# Altium PCB PCB2.PcbDoc
Units mil, origin at the board's own origin, x right, y up, seen from the top; angles counter-clockwise.
Board outline 1340 x 970 mil, 2 copper layers (Top Layer, Bottom Layer); 12 components, 9 nets, 58 pads, 7 vias.
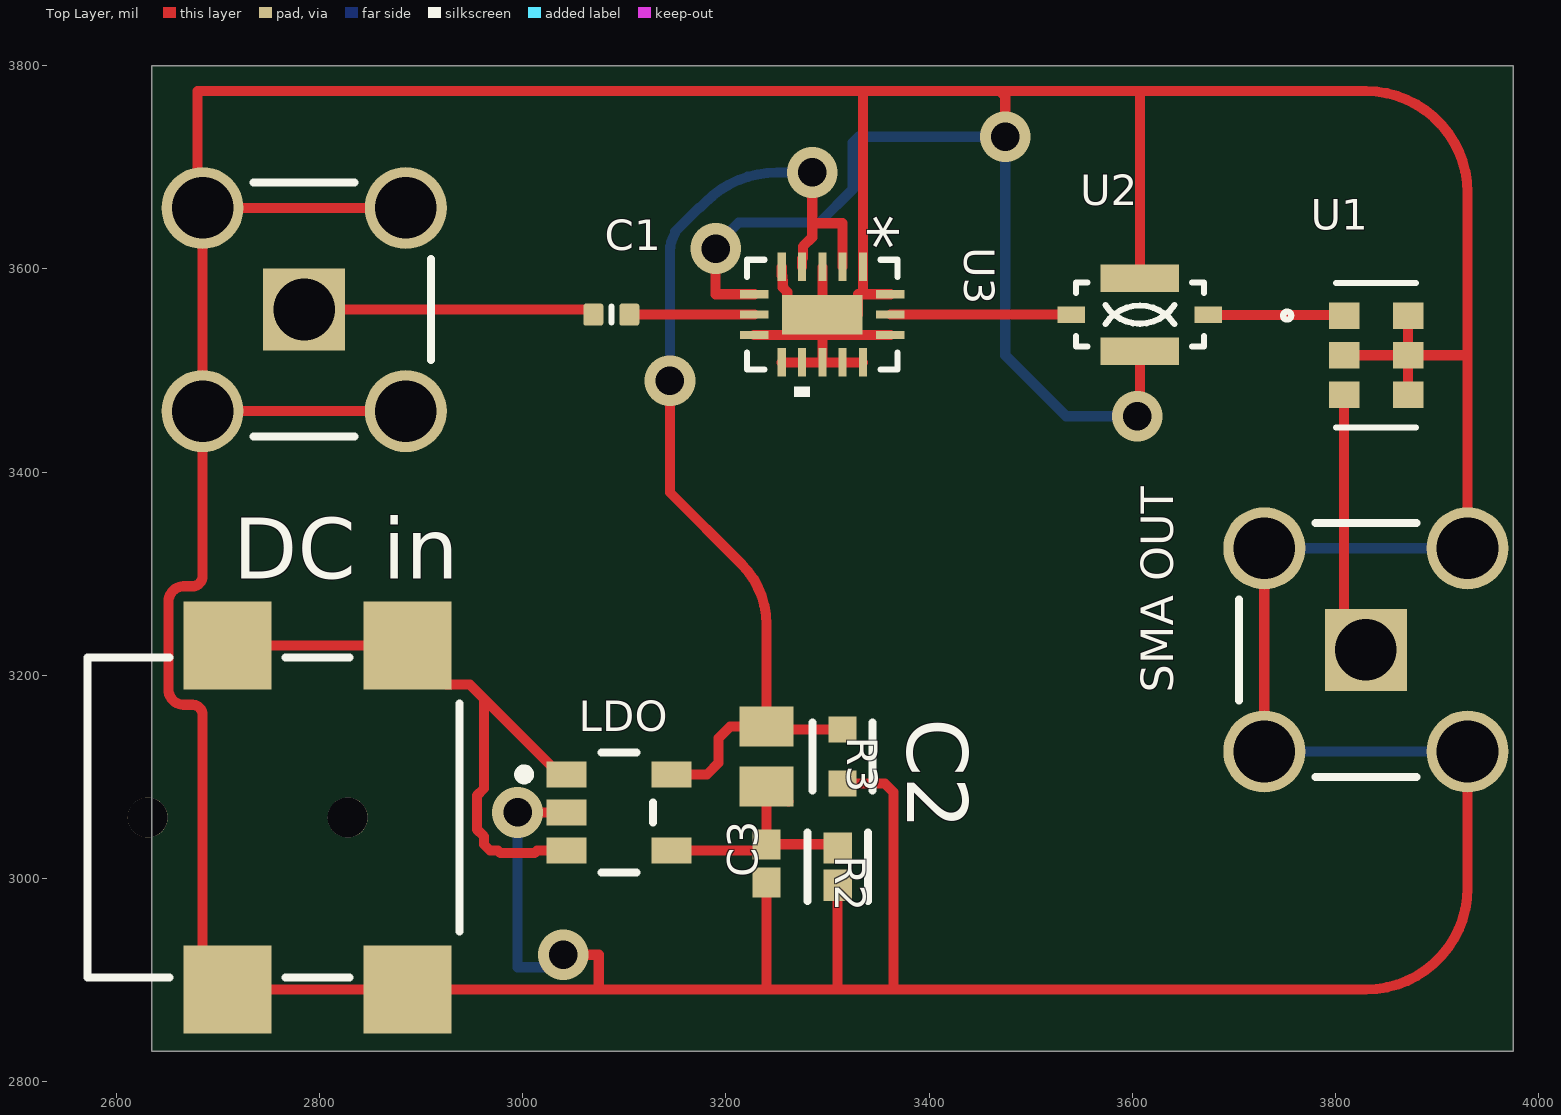
[diagram p0: Top Layer view]
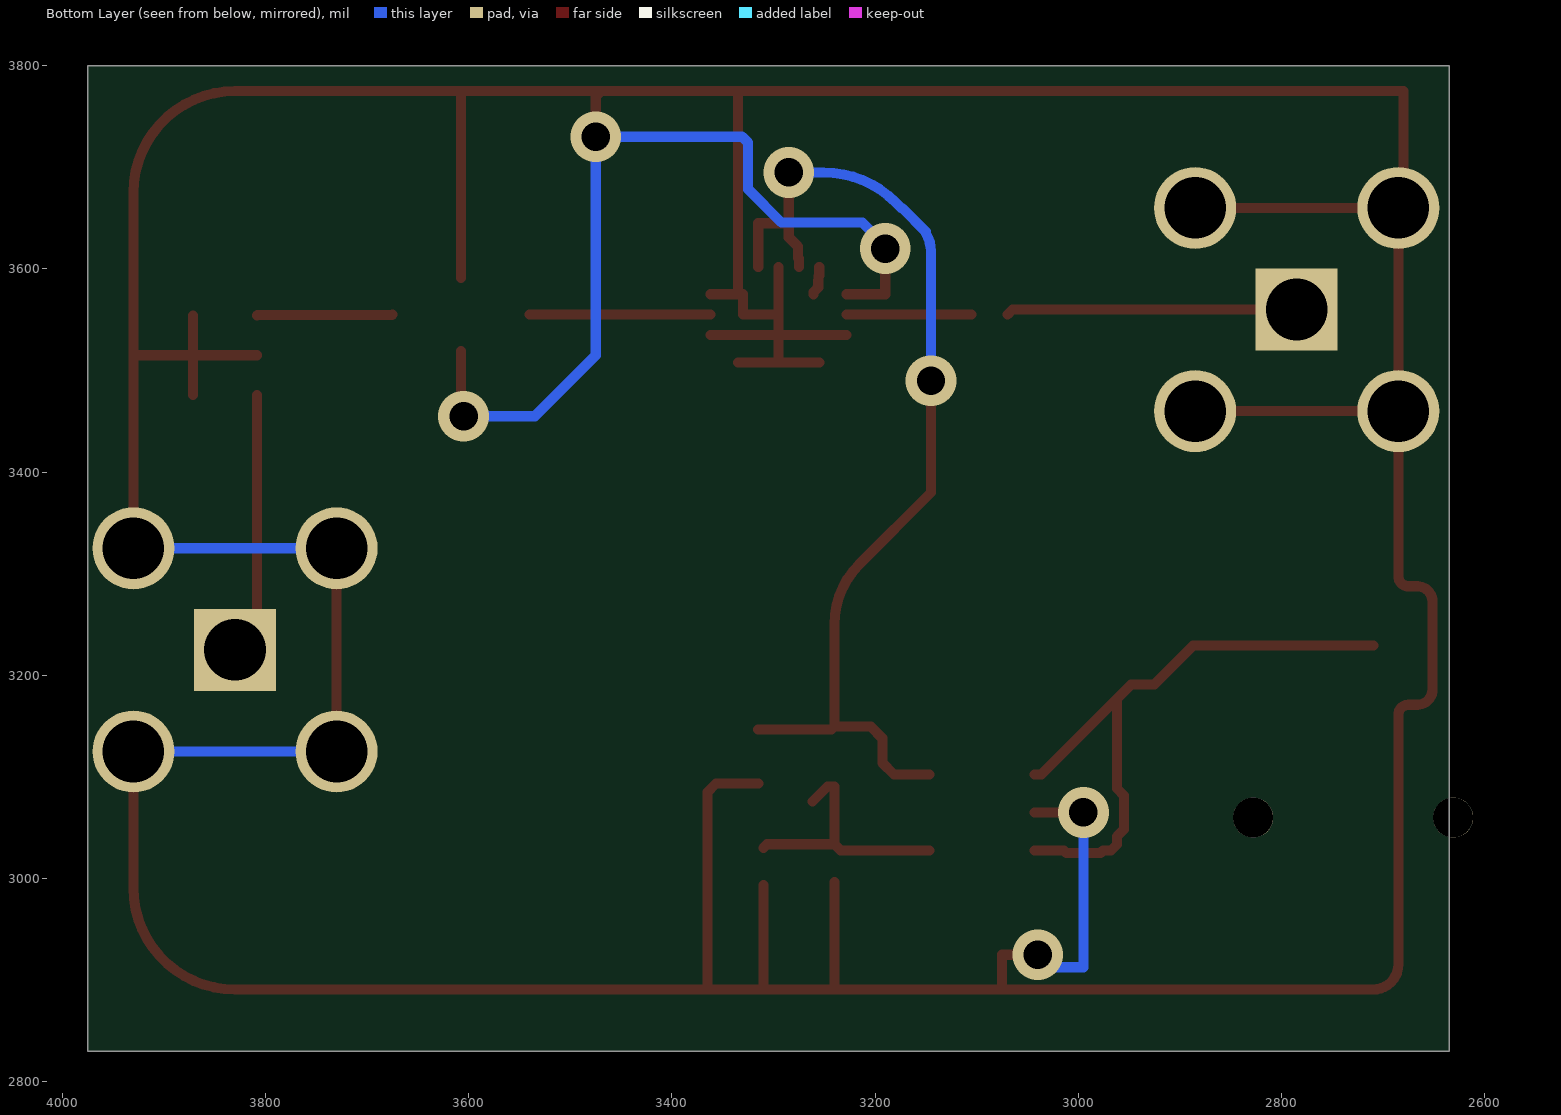
[diagram p1: Bottom Layer view, seen from below]
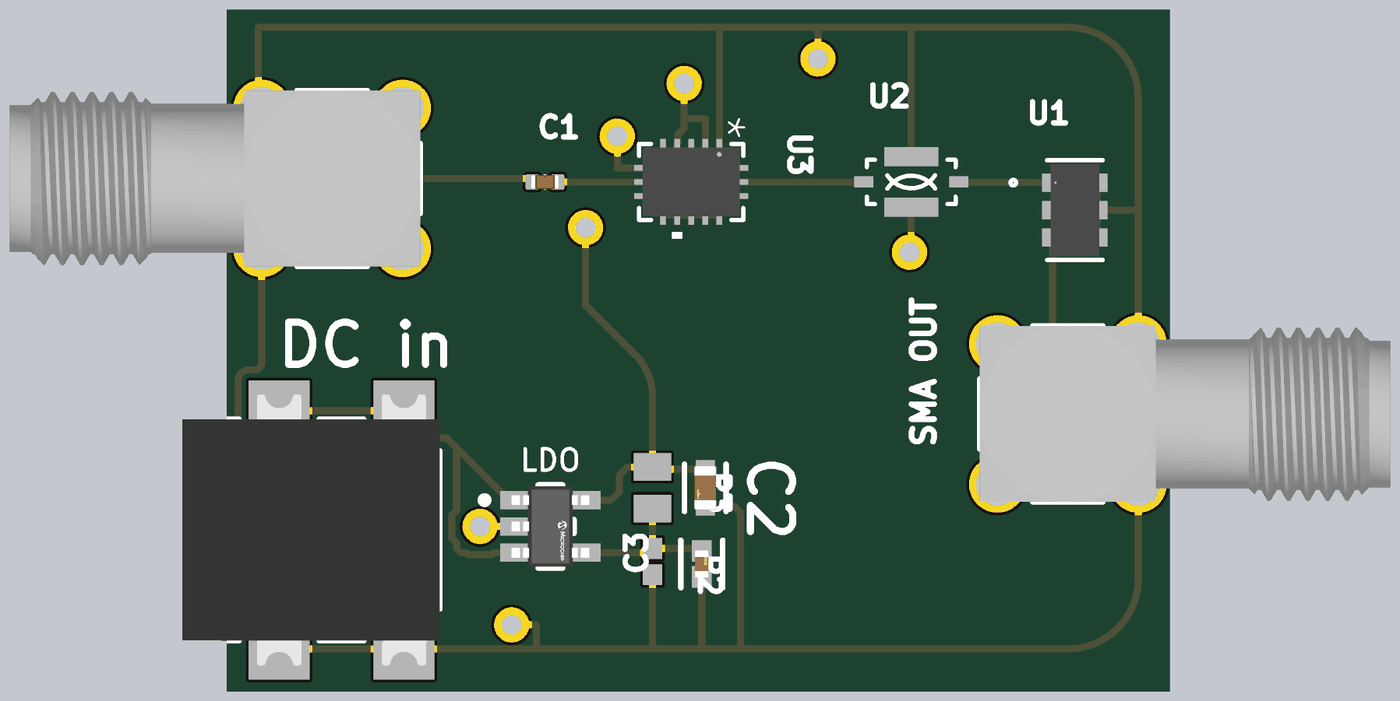
[diagram p2: 3D render of the assembled board from above, using the file's embedded part models]

## Layer stack, top to bottom
Top Solder: solder mask 0.4, Solder Resist, Dk 3.5
Top Layer: signal copper 1.4
Dielectric 1: dielectric 12.6, FR-4, Dk 4.8
Bottom Layer: signal copper 1.4
Bottom Solder: solder mask 0.4, Solder Resist, Dk 3.5

## Board outline
2635,3800 2635,2830 3975,2830 3975,3800

## Design rules (kind name [scope] priority, off if disabled: settings)
Clearance [All] p1: gap=10 ignorepadtopadclearanceinfootprint=FALSE except(0: Arc-Hole Track-Hole SMDPad-Hole THPad-Hole Via-Hole Fill-Hole Poly-Hole Region-Hole Text-Hole)
PolygonConnect [All] p1: connectstyle=Relief reliefconductorwidth=10 reliefentries=4 polygonreliefangle="90 Angle" airgapwidth=10
RoutingVias [All] p1: holewidth=28 width=50 viastyle="Through Hole" minholewidth=28 minwidth=50 maxholewidth=28 maxwidth=50
SolderMaskExpansion [All] p1: expansion=4 istentingtop=FALSE
Width [All] p1: maxlimit=10 minlimit=10 preferedwidth=10
30 further rules are at their usual default settings.

## Classes and differential pairs
component class Sheet1: C1 C2 C3 R2 R3 "SMA OUT"

## Components (designator, comment, footprint, x,y, rotation, side; value= is the part's Value field where it differs from the comment)
C1 "Capacitor 10nF +/-20% 50V 0402" CAPC0402(1005)60_L 3087.28,3555 r0 top value=10nF
C2 "2.2 uF" FP-GRM188-0_1-e0_2_0_5-MFG 3315,3120 r270 top value=2.2uF
C3 "470 pF" FP-0402-L_1_0_1-W_0_5_0_1-IPC_A 3310,3011.67 r90 top value=470pF
"DC in" "694102107102" 694102107102 2755,3060 r270 top (schematic designator J?)
LDO "MIC5205YM5-TR" FP-SOT23-5LD-PL-1-MFG 3095,3065 r0 top (schematic designator U4)
R2 "" RESC1005X40X25ML10T10 3240,3015 r270 top
R3 "" RESC2013X60X40LL20T25 3240,3120 r270 top
"SMA OUT" "731000114" MOLX-731000114_V 3830,3225 r180 top
U1 "HFCN-7150+" FV1206-1_MNC 3840,3515 r0 top
U2 "LFCN-8400+" FV1206-4_MNC 3607.5,3555 r0 top
U3 "PMA-183PLN+" JV2579_MNC 3295,3555 r270 top
? "731000114" MOLX-731000114_V 2785,3560 r0 top

## Footprints (in the part's own frame and the unit in brackets; to place one, negate y for a bottom-side part, rotate by r counter-clockwise, add the part's x,y. Pads: shape width x height; smd on the part's side, far side on the other; paste and mask are expansions set on the pad)
694102107102 [mm] "DC Power Jack Right Angled Low Profile SMT ?3.9 with 4 soldering pads & pegs"
  rect 2.2x2.2 smd: 1(-4.3,3.35) 1(-4.3,-1.15) 2(4.3,-1.15) 3(4.3,3.35)
  round 1 hole 1 unplated: MH1(0,1.85) MH2(0,-3.15)
  silkscreen extent -4,-4.65 4,4.65, body extent -4.9,-4.65 4.9,4.65, height 5.32
CAPC0402(1005)60_L [mm] "Chip Capacitor, Body 1.0x0.5mm, Height 0.6mm, IPC High Density"
  rrect25% 0.5x0.55 smd: 1(-0.45,0) 2(0.45,0)
  silkscreen extent 0,-0.2 0,0.2, body extent -0.5,-0.25 0.5,0.25, height 0.6
FP-0402-L_1_0_1-W_0_5_0_1-IPC_A [mil]
  rect 30.75x28.04 smd paste+0 mask+0: 1(-18.33,0) 2(18.33,0)
  silkscreen extent -34,-30 34,30, body extent -42,-22 42,22, height 10
FP-GRM188-0_1-e0_2_0_5-MFG [mm]
  rect 0.65x0.7 smd paste+0 mask+0: 1(-0.675,0) 2(0.675,0)
  silkscreen extent -0.85,-0.75 0.85,0.75, body extent -1.1,-0.55 1.1,0.55, height 0.25
FP-SOT23-5LD-PL-1-MFG [mm]
  rect 1x0.66 smd paste+0 mask+0: 1(-1.315,0.95) 2(-1.315,0) 3(-1.315,-0.95) 4(1.315,-0.95) 5(1.315,0.95)
  silkscreen extent -2.5,-1.5 0.85,1.5, body extent -1.91,-1.6 1.91,1.6, height 0.25
FV1206-1_MNC [mil]
  rect 30x26 smd paste+0 mask+0: 1(-31.5,39) 2(-31.5,0) 3(-31.5,-39) 4(31.5,-39) 5(31.5,0) 6(31.5,39)
  silkscreen extent -91,-71 40,71, body extent -34,-66 34,66, height 42
FV1206-4_MNC [mil]
  rect 27x16 smd paste+0 mask+0: 1(-67.5,0) 3(67.5,0)
  rect 77x27 smd paste+0 mask+0: 2(0,-36) 4(0,36)
  silkscreen extent -63,-32 63,32
JV2579_MNC [mil]
  rect 28x8 smd paste+0 mask+0: 1(-47,40) 2(-47,20) 3(-47,0) 4(-47,-20) 5(-47,-40) 9(47,-40) 10(47,-20) 11(47,0) 12(47,20) 13(47,40)
  rect 8x28 smd paste+0 mask+0: 6(-20,-67) 7(0,-67) 8(20,-67) 14(20,67) 15(0,67) 16(-20,67)
  rect 39x79 smd paste+0 mask+0: 17(0,0)
  silkscreen extent -54,-74 81,74, body extent -49,-69 49,69, height 33
MOLX-731000114_V [mm] "Connector, 5-Leads, Body 14.8x6.35mm, Pitch 2.54mm"
  rect 2.05x2.05 hole 1.54: 1(0,0)
  round 2.05 hole 1.54: 2(-2.54,2.54) 3(-2.54,-2.54) 4(2.54,-2.54) 5(2.54,2.54)
  silkscreen extent -1.26,-3.17 3.17,3.17, body extent -11.62,-3.17 3.18,3.18, height 9.57
RESC1005X40X25ML10T10 [mm] "Chip Resistor, 2-Leads, Body 1.00x0.50mm, IPC Low Density"
  rect 0.75x0.7 smd: 1(-0.475,0) 2(0.475,0)
  body extent -0.55,-0.3 0.55,0.3, height 0.4
RESC2013X60X40LL20T25 [mm] "Chip Resistor, 2-Leads, Body 2.00x1.25mm, IPC High Density"
  rect 1x1.35 smd: 1(-0.75,0) 2(0.75,0)
  body extent -1.1,-0.72 1.1,0.72, height 0.6

## Part data
C1: library part CMP-001-00069-3, "Chip Capacitor, 10nF +/-20%, 50V, 0402, Thickness 0.6 mm", Case/Package=0402, Max Operating Temperature=85°C, Min Operating Temperature=-55°C, Tolerance=5%, Voltage Rating=50V, Mounting Technology=SMT, Pins=2
C2: library part CMP-2006-02836-2, "Chip Multilayer Ceramic Capacitors for General Purpose, 0603, 2.2uF, X7R, 15%, 10%, 10V", Capacitance=2.2uF, Case Code (Imperial)=0603, Case Code (Metric)=1608, Dielectric=X7R, Max Operating Temperature=125°C, Min Operating Temperature=-55°C, Package Quantity=1, Tolerance=10%, Voltage=10V, Case/Package=0603, Depth=0.8mm, Height=0.8mm, Lead Free="Lead Free", Length=1.6mm, Material=Ceramic, Mount="Surface Mount", Number of Pins=2, Packaging="Cut Tape", REACH SVHC="No SVHC", Termination=SMD/SMT, Thickness=0.035inch, Voltage Rating=10V, Voltage Rating (DC)=10V, Weight=7.1E-05oz, Width=0.031inch
C3: library part CMP-1034-01502-3, "General Purpose Ceramic Capacitor, 0402, 470pF, 10%, X7R, 15%, 50V", Capacitance=470pF, Case Code (Imperial)=0402, Case Code (Metric)=1005, Dielectric=X7R, Max Operating Temperature=125°C, Min Operating Temperature=-55°C, Package Quantity=10000, Tolerance=10%, Voltage=50V, Case/Package=0402, Construction=Flat, Contact Plating=Tin, Depth=0.5mm, Height=0.5mm, Lead Free="Lead Free", Length=1mm, Mount="Surface Mount", Number of Pins=2, Packaging="Tape and Reel", Radiation Hardening=No, REACH SVHC="No SVHC", RoHS Compliant=Yes, Series=-, Termination=SMD/SMT, Thickness=0.022inch, Voltage Rating=50V, Voltage Rating (DC)=50V, Width=0.5mm
"DC in": library part CMP-1502-00174-2, Color=Black, Current Rating=5A, Flammability Rating="UL94 V-0", Insulation Resistance=100MΩ, Max Operating Temperature=85°C, Min Operating Temperature=-40°C, Operating Supply Voltage=18V, Connector Type=Power, Contact Gender=Female, Contact Plating=Tin, Gender=Male, Housing Material=Polyamide, Mount="Surface Mount", NexarPartId=52645180, Packaging="Tape and Reel", REACH SVHC=Unknown, RoHS=Compliant, Shielding=Unshielded, Termination=SMD/SMT, Voltage Rating=18V, Voltage Rating (DC)=18V
LDO: library part CMP-06324-000022-1, "IC REG LIN POS ADJ 150MA SOT23-5", Dropout Voltage=165mV, Manufacturer=Microchip, Max Junction Temp=+125°C, Max Supply Voltage=16V, Min Supply Voltage=2.5V, Nominal Supply Current=80-1300uA, Output Current=150mA, Package=SOT23-5LD-PL-1, Temperature="-40°C to +125°C", Temperature Range Low=-40°C, Accuracy Percentage=1%, Automotive=No, Category=IC, ComponentLink2Description=Datasheet, ComponentLink2URL=http://ww1.microchip.com/downloads/en/DeviceDoc/20005785A.pdf, Device Class L1="Integrated Circuits (ICs)", Device Class L2="Power Management ICs", Device Class L3="Voltage Regulators - Linear", Digikey Description="IC REG LIN POS ADJ 150MA SOT23-5", Height=1.45mm, Lead Free=Yes, Manufacturer Part Number=MIC5205YM5-TR, Mouser Description="LDO Voltage Regulators 150mA 1% Low Noise LDO (Lead Free)", Number Of Outputs=1, Octopart=https://octopart.com/mic5205ym5-tr-microchip-66802135, Output Type=AdjustableProgrammable, RoHS=TRUE, Standoff Height=0mm, Temperature Range High=+125°C
R2: library part CMP-2002-05819-1, Manufacturer=Panasonic, Part Number=ERA-2AEB621X
R3: library part CMP-2001-00628-1, Manufacturer=Panasonic, Part Number=ERA6AEB331V
"SMA OUT" ?: library part CMP-2000-05487-1, "SMA Right-Angle PCB Jack Receptacle, Brass Body, Gold Plated, 50 Ohm, 5-Pin THD, RoHS, Tray", Manufacturer=Molex, Package Description="5-Pin Through Hole Device, Body 14.8 x 6.35 mm, Pitch 2.54 mm", Datasheet URL=http://www.molex.com/webdocs/datasheets/pdf/en-us/0731000114_RF_COAX_CONNECTORS.pdf, Datasheet Version=09/2016, Manufacturer URL=http://www.molex.com/, Mounting Technology=ThroughHole, Package Reference=731000114, Package URL=http://www.molex.com/pdm_docs/sd/731000114_sd.pdf
U1 U2 U3: "No Description Available", Mfr_Name="Mini Circuits", Copyright="Copyright (C) 2024 Ultra Librarian. All rights reserved.", RefDes=RefDes, Type=DEV
  U1: Manufacturer_Part_Number=HFCN-7150+
  U2: Manufacturer_Part_Number=LFCN-8400+
  U3: Manufacturer_Part_Number=PMA-183PLN+

## Via types
v1: diameter 50, hole 28, Top Layer to Bottom Layer, 7 vias

## Nets (pads, with @x,y where several pads share a name; then routed paths per layer and width w, separated by ;. In a path a pad name is that pad's centre, name@x,y a point inside that pad or via, vN(x,y) a via of type N, cw(c..) or ccw(c..) an arc to the next point about the centre after c; other vN are vias at no path point)
GND: "DC in.2" "DC in.3" "SMA OUT.2" "SMA OUT.3" "SMA OUT.4" "SMA OUT.5" ?.2 ?.3 ?.4 ?.5 C2.2 C3.1 LDO.2 R2.2 U1.2 U1.4 U1.5 U1.6 U2.2 U2.4 U3.1 U3.3 U3.5 U3.6 U3.8 U3.9 U3.10 U3.11 U3.12 U3.13 U3.14 U3.16 U3.17 | length 7731.8
  Top Layer w10: ?.4 ?.3 ; ?.5 ?.2 ; v1(2995,3065) LDO.2 ; v1(3040,2925) 3075,2925 3075,2890.71 ; v1(3190,3620) 3190,3575 U3.6 ; U3.8 3295,3535 ; R2.2 3240,2890.71 ; U3.9 U3.10 U3.11 ; U3.5 3255,3593.72 3255.72,3593 3255.72,3588.94 3256,3588.66 3256,3581.79 3260.5,3577.29 3260.5,3575 ; U3.3 U3.17 ; C3.1 3310,2890.71 ; C2.2 3356.57,3093.43 3365,3085 3365,2890.71 ; U3.13 U3.12 U3.11 ; U3.14 3295,3535 ; U3.16 3335,3575 ; v1(3475,3730) 3475,3770 3470,3775 ; v1(3605,3455) 3607.5,3457.5 U2.2 ; U2.4 3607.5,3772.5 3605,3775 ; 3730,3125 3730,3325 ; U1.2 U1.5 ; U1.4 U1.5 ; U1.6 U1.5 ; 3930,3125 3930,2990.71 cw(c3830,2990.71) 3830,2890.71 3365,2890.71 ; 3930,3325 3930,3515 ; ?.3 ?.2 ; ?.3 2685,3297.6 cw(c2675,3297.6) 2675,3287.6 2666.42,3287.6 ccw(c2666.42,3272.6) 2651.42,3272.6 2651.42,3185.98 ccw(c2666.42,3185.98) 2666.42,3170.98 2675,3170.98 cw(c2675,3160.98) 2685,3160.98 2685,2915.44 ccw(c2709.73,2915.44) 2709.73,2890.71 2886.89,2890.71 3075,2890.71 ; ?.2 cw(c2685,3665) 2680,3665 2680,3775 3335,3775 ; 3075,2890.71 3240,2890.71 ; 3240,2890.71 3310,2890.71 ; U3.11 3295,3535 ; 3295,3535 U3.17 ; U3.17 3330,3555 3330,3575 3335,3575 ; 3310,2890.71 3365,2890.71 ; 3335,3575 U3.1 3335,3775 ; 3335,3775 3470,3775 ; 3470,3775 3605,3775 ; 3605,3775 3830,3775 cw(c3830,3675) 3930,3675 3930,3515 ; U1.5 3930,3515
  Bottom Layer w10: v1(2995,3065) 2995,2912.67 3040,2912.67 v1(3040,2925) ; v1(3190,3620) 3190,3623.14 3212.57,3645.71 3292.28,3645.71 3325,3678.43 3325,3724.14 3330.86,3730 v1(3475,3730) 3475,3515 3535,3455 v1(3605,3455) ; 3730,3125 3930,3125 ; 3730,3325 3930,3325
Net_1: ?.1 C1.1 | length 286.7
  Top Layer w10: ?.1 3064.72,3560 3069.57,3555.16 C1.1
NetC1_2: C1.2 U3.7 | length 123
  Top Layer w10: C1.2 U3.7
NetC3_2: C3.2 LDO.4 R2.1 R3.2 | length 251.7
  Top Layer w10: LDO.4 3233.9,3027.6 R2.1 ; R3.2@3261.57,3075.79 3246.89,3090.47 R3.2 R2.1 ; C3.2 3306.3,3033.7 R2.1
NetJ?_1: "DC in.1" LDO.1 LDO.3 | length 621.2
  Top Layer w10: 2709.73,3229.29 2886.89,3229.29 2925.2,3190.98 2947.95,3190.98 2961.97,3176.97 ; LDO.3 3014.17,3027.6 3011.57,3025 2978.43,3025 2975.83,3027.6 2967.83,3027.6 2961.97,3033.46 2961.97,3041.46 2955,3048.43 2955,3081.57 2961.97,3088.54 2961.97,3176.97 ; LDO.1 3036.54,3102.4 2961.97,3176.97
"NetSMA OUT_1": "SMA OUT.1" U1.3 | length 263.3
  Top Layer w10: U1.3 3808.5,3246.5 ccw(c3830,3246.5) 3830,3225
NetU1_1: U1.1 U2.3 | length 133.9
  Top Layer w10: U2.3 3675.5,3554.5 3808,3554.5 U1.1
NetU2_1: U2.1 U3.15 | length 178
  Top Layer w10: U3.15 U2.1
VCC: C2.1 LDO.5 R3.1 U3.2 U3.4 | length 1052
  Top Layer w10: v1(3145,3490) 3145,3380 3215.25,3309.75 cw(c3155.5,3250) 3240,3250 R3.1 ; LDO.5 3181.46,3102.4 3192.87,3113.82 3192.87,3138.12 3204.28,3149.53 R3.1 ; U3.4 3275,3610 3276,3611 3276,3622.21 3285,3631.21 3285,3645 ; v1(3285,3695) 3285,3645 ; C2.1 3242.95,3146.57 R3.1 ; U3.2 3315,3645 3285,3645
  Bottom Layer w10: v1(3145,3490) 3145,3617.53 cw(c3177,3617.53) 3150,3634.7 3150,3636.57 3173.43,3660 3174.22,3660 3179.93,3665.71 cw(c3250.64,3595) 3250.64,3695 v1(3285,3695)
pads on no net: "DC in.MH1" "DC in.MH2"

## Text inside footprints (layer, text, board x,y; h text height)
U3: Top Overlay "*" at 3320,3653.5 h50 r270; Top Assembly "*" at 3320,3600.5 h50 r270